# EAGLE board wigl_sch_motors (EAGLE 7.2.0)
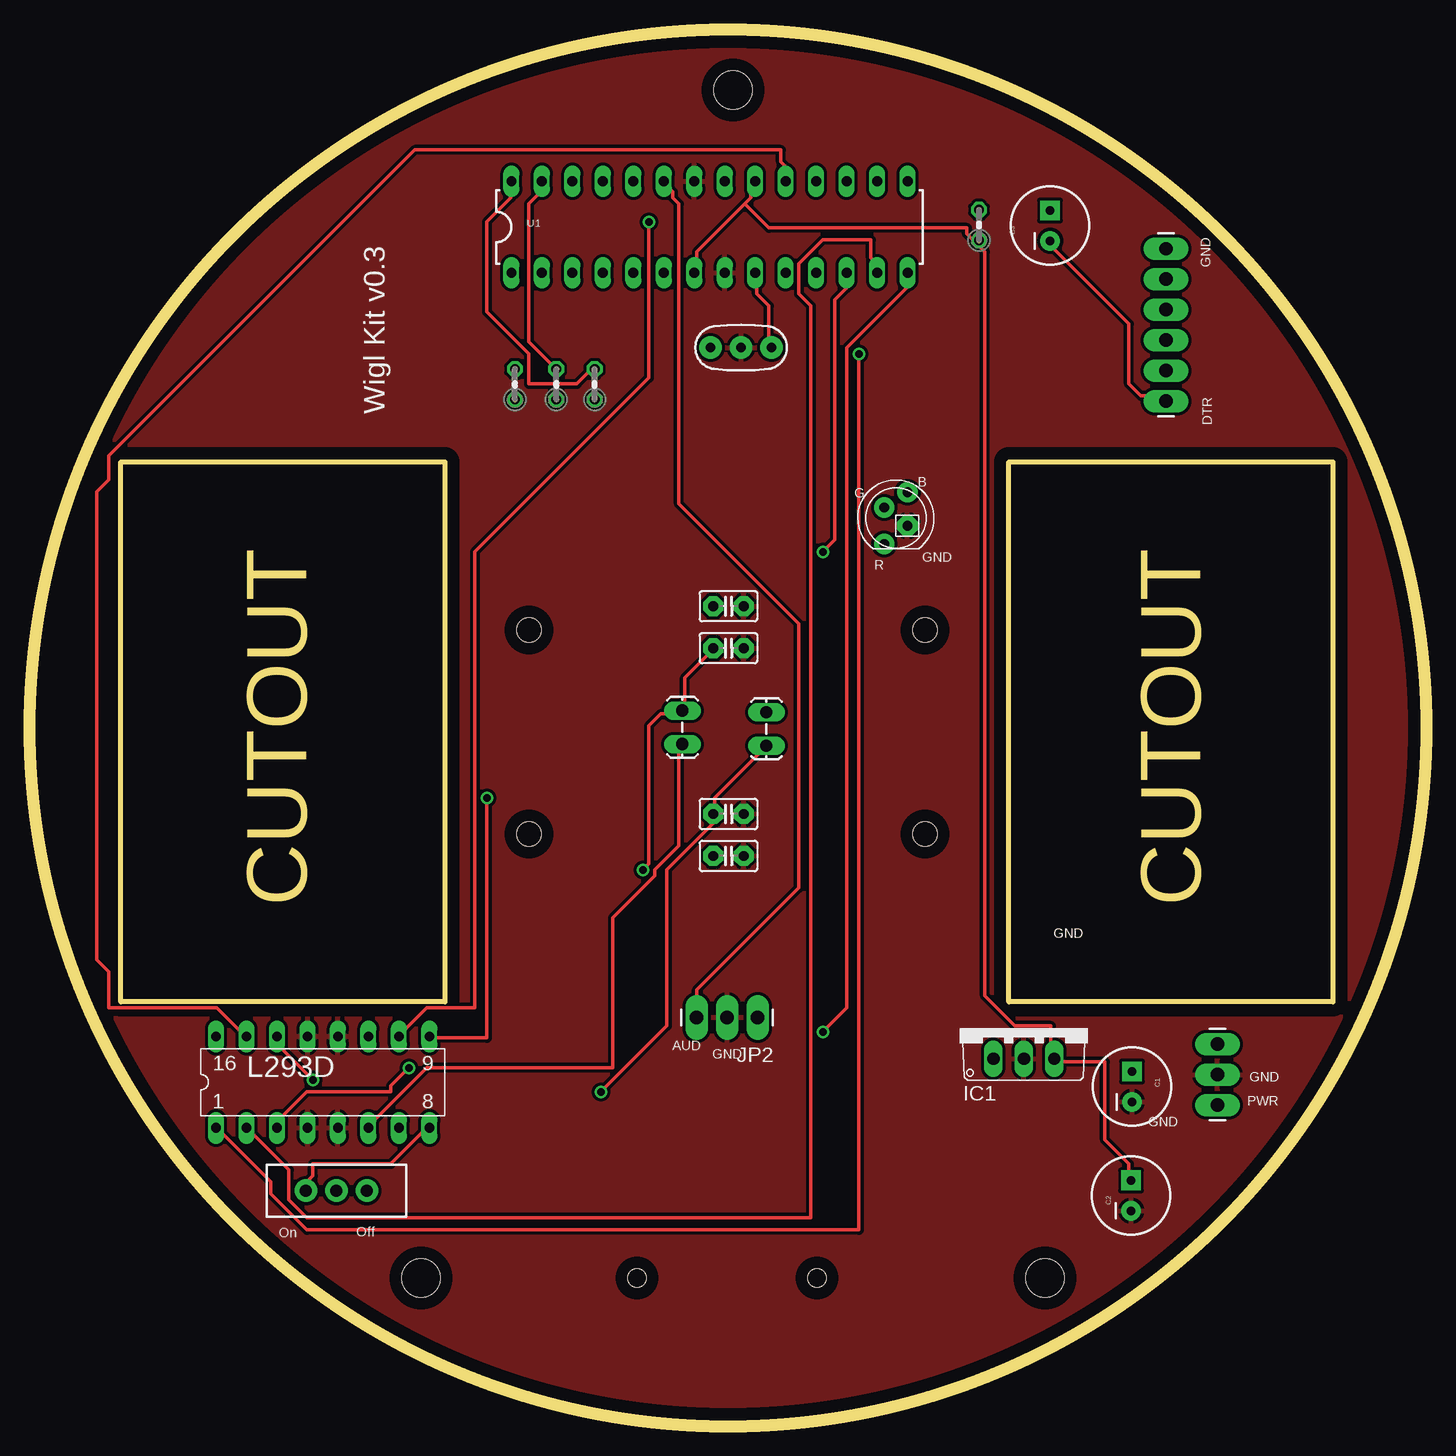
[diagram p0: board, top side]
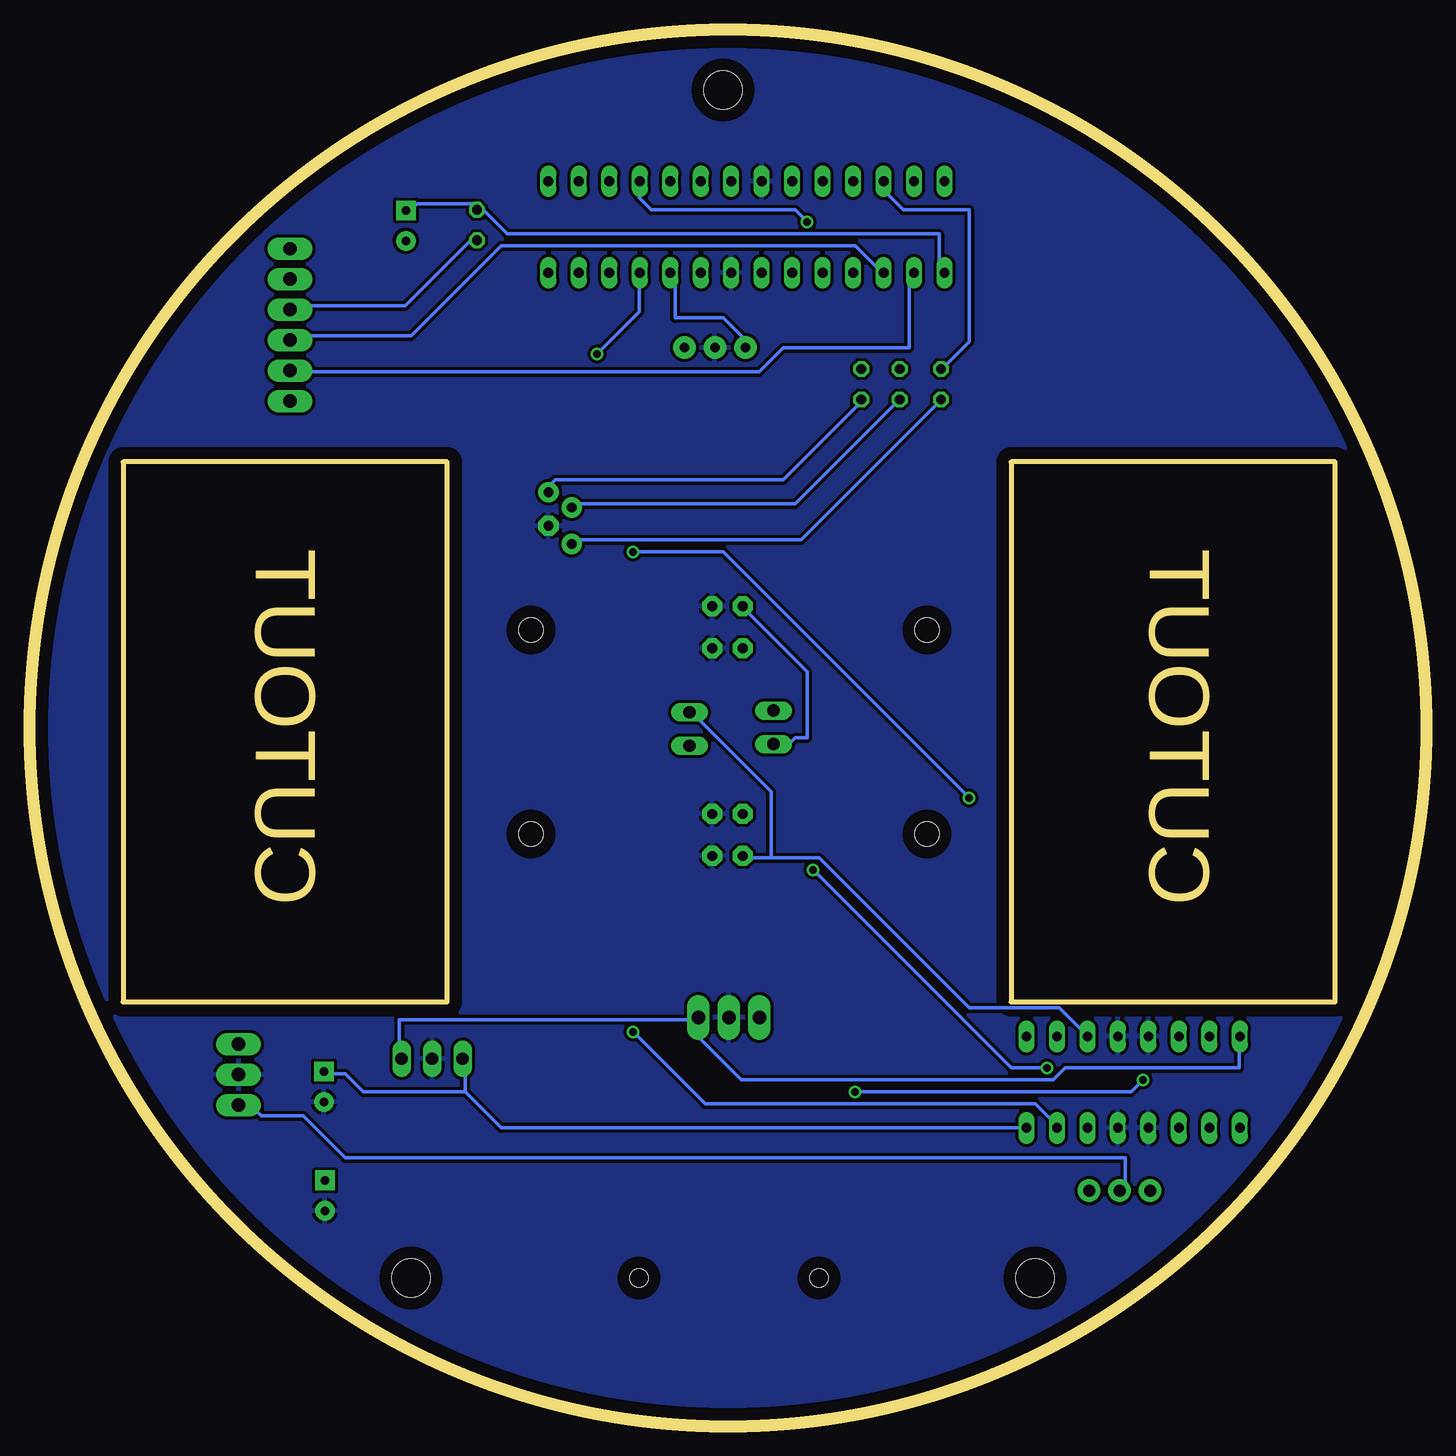
[diagram p1: board, bottom side, seen from below]

Size 116.33 x 116.33 mm. Coordinates in mm from the lower left corner, seen from the top.
Outline: circle at 58.17,58.17 radius 58.17
Copper layers (1*16): Top 0.035mm / dielectric 1.5mm / Bottom 0.035mm
Design rules "default": minimum track width 10mil, minimum drill 24mil, track to track 8mil, track to pad 8mil, pad to pad 8mil, via to via 8mil, smd to smd 8mil, copper to edge 40mil, drill to drill 8mil, minimum pad ring 10mil, minimum via ring 8mil, stop-mask expansion 4mil, vias tented up to drill 0mil, thermal gap 10mil
Net classes: 0 default: width 0.305 mm, drill 0.508 mm, clearance 0.254 mm
Holes 2 mm at 41.58,66.34 41.58,49.34 74.58,66.34 74.58,49.34
Holes 1.5 mm at 50.58,12.34 65.58,12.34
Holes 3.2 mm at 58.58,111.34 32.58,12.34 84.58,12.34
tRestrict: 8 lines
bRestrict: 8 lines

## Footprints (pad centres in the part's own frame; a part is rotated, then mirrored left to right if it is on the bottom)
CPOL-RADIAL-100UF-25V = drill 0.7 pad 1.651 square: 1 1.27,0 | drill 0.7 pad 1.651: 2 -1.27,0
C025-025X050 = drill 0.813 pad 1.676 octagon: 1 -1.27,0; 2 1.27,0
TO220V = drill 1.016 long: 1 -2.54,-2.54; 2 0,-2.54; 3 2.54,-2.54
1X03_LONGPADS = drill 1.118 pad 1.88 long: 1 0,0; 2 2.54,0; 3 5.08,0
1X02_LOCK_LONGPADS = drill 1.016 long: 1 -0.127,0; 2 2.667,0
1X06_LONGPADS = drill 1.118 pad 1.88 long: 1 0,0; 2 2.54,0; 3 5.08,0; 4 7.62,0; 5 10.16,0; 6 12.7,0
DIP16 = drill 0.813 long: 1 -8.89,-3.81; 2 -6.35,-3.81; 3 -3.81,-3.81; 4 -1.27,-3.81; 5 1.27,-3.81; 6 3.81,-3.81; 7 6.35,-3.81; 8 8.89,-3.81; 9 8.89,3.81; 10 6.35,3.81; 11 3.81,3.81; 12 1.27,3.81; 13 -1.27,3.81; 14 -3.81,3.81; 15 -6.35,3.81; 16 -8.89,3.81
0204V = drill 0.813 octagon: 1 -1.27,0; 2 1.27,0
LED5MMRGB = drill 0.8 pad 1.676: 1 -2.159,0.968; 3 0.889,0.968; 4 2.159,-0.968 | drill 0.8 pad 1.676 octagon: 2 -0.635,-0.968
SWITCH-SPDT = drill 1.016 pad 1.88: 1 0,2.54; 2 0,0; 3 0,-2.54
DIL28-3 = drill 0.813 long: 1 -16.51,-3.81; 2 -13.97,-3.81; 3 -11.43,-3.81; 4 -8.89,-3.81; 5 -6.35,-3.81; 6 -3.81,-3.81; 7 -1.27,-3.81; 8 1.27,-3.81; 9 3.81,-3.81; 10 6.35,-3.81; 11 8.89,-3.81; 12 11.43,-3.81; 13 13.97,-3.81; 14 16.51,-3.81; 15 16.51,3.81; 16 13.97,3.81; 17 11.43,3.81; 18 8.89,3.81; 19 6.35,3.81; 20 3.81,3.81; 21 1.27,3.81; 22 -1.27,3.81; 23 -3.81,3.81; 24 -6.35,3.81; 25 -8.89,3.81; 26 -11.43,3.81; 27 -13.97,3.81; 28 -16.51,3.81
RESONATOR-PTH = drill 0.8 pad 1.88: 1 -2.54,0; 2 0,0; 3 2.54,0

## Placement (x,y rotation side)
C1  100uF  [CPOL-RADIAL-100UF-25V]  91.84,28.28 90 top
C2  10uF  [CPOL-RADIAL-100UF-25V]  91.76,19.2 90 top
C3  10uF  [CPOL-RADIAL-100UF-25V]  85.01,100.03 90 top
C4  1uf  [C025-025X050]  58.21,64.82 0 top
C5  1uf  [C025-025X050]  58.21,68.32 0 top
C6  1uf  [C025-025X050]  58.21,47.51 0 top
C7  1uf  [C025-025X050]  58.21,51.01 0 top
IC1  7805TV  [TO220V]  82.83,33.15 0 top
JP1  [1X03_LONGPADS]  98.96,31.83 270 top
JP2  [1X03_LONGPADS]  60.63,34.05 180 top
JP3  [1X02_LOCK_LONGPADS]  54.37,59.5 270 top
JP4  [1X02_LOCK_LONGPADS]  61.37,59.36 270 top
JP5  [1X06_LONGPADS]  94.67,98.11 270 top
L293D  [DIP16]  24.4,28.66 0 top
R1  10k  [0204V]  79.09,100.08 90 top
R2  [0204V]  40.42,86.81 90 top
R3  [0204V]  43.86,86.81 90 top
R4  [0204V]  47.06,86.81 90 top
RGB  RGBLED_CA-5MM  [LED5MMRGB]  72.16,75.66 90 top
SW  [SWITCH-SPDT]  25.53,19.61 270 top
U1  ATMEGA328P_PDIP  [DIL28-3]  56.63,99.92 0 top
Y1  [RESONATOR-PTH]  59.26,89.87 180 top

## Library data of the parts
C1 C2 = SparkFun-Capacitors
C3 = SparkFun-Passives
C4-C7 R1-R4 RGB = adafruit
IC1 = linear
JP1-JP5 = SparkFun-Connectors
L293D = ads
SW = SparkFun-Electromechanical
U1 = SparkFun-DigitalIC
Y1 = SparkFun-FreqCtrl

## Nets
5V: C2.1 IC1.3 JP2.1 JP5.3 L293D.16 R1.1 U1.7 U1.20
AUD: JP2.3 U1.23
BLED: R4.2 U1.28
GLED: R3.2 U1.27
GND: C1.2 C2.2 C4.2 C5.2 C6.2 C7.2 IC1.2 JP1.2 JP2.2 L293D.4 L293D.5 L293D.12 L293D.13 RGB.2 U1.8 U1.22 Y1.2
N$1: JP1.3 SW.2
N$2: R4.1 RGB.4
N$3: R3.1 RGB.3
N$4: C3.2 JP5.6
N$5: U1.9 Y1.1
N$6: U1.10 Y1.3
N$7: L293D.9 U1.12
N$8: R2.1 RGB.1
N$9: L293D.2 U1.13
N$10: L293D.7 U1.14
N$11: U1.15
N$12: U1.16
N$13: U1.17
N$14: L293D.10 U1.18
N$15: L293D.15 U1.19
N$16: L293D.1 U1.11
OUT1A: C4.1 JP3.1 L293D.3
OUT1B: C5.1 JP3.2 L293D.6
OUT2A: C6.1 JP4.1 L293D.11
OUT2B: C7.1 JP4.2 L293D.14
RLED: R2.2 U1.26
RST: C3.1 R1.2 U1.1
RX: JP5.5 U1.2
TX: JP5.4 U1.3
V_BATT: C1.1 IC1.1 L293D.8 SW.3

## Tracks (layer width: path | path; a pad name or v marks a point on that pad's centre or on a via)
5V
  Top 0.305: 59.58,101.84 60.08,102.34 60.08,103.34 U1.20 | 59.58,101.84 55.58,97.84 55.58,96.34 U1.7 | 59.58,101.84 61.58,99.84 78.08,99.84 78.08,99.34 79.08,98.34 | C2.1 91.58,20.84 91.58,21.84 89.58,23.84 89.58,30.34 85.58,30.34 IC1.3 85.08,30.84 85.08,33.34 82.08,33.34 79.58,35.84 79.58,97.84 79.08,98.34 | 79.08,98.34 R1.1
  Bottom 0.305: R1.1 79.58,98.84 85.08,93.34 94.58,93.34 JP5.3 | L293D.16 15.58,32.34 15.58,29.84 30.08,29.84 31.08,28.84 57.08,28.84 60.58,32.34 60.58,33.84 JP2.1 61.08,33.84 85.58,33.84 85.58,30.84 IC1.3
AUD
  Top 0.305: U1.23 53.08,103.34 53.58,102.84 53.58,102.34 54.08,101.84 54.08,76.84 64.08,66.84 64.08,44.84 55.58,36.34 55.58,34.34 JP2.3
BLED
  Top 0.305: R4.2 46.58,87.84 45.58,86.84 41.58,86.84 41.58,89.34 38.08,92.84 38.08,100.34 40.08,102.34 40.08,103.34 U1.28
GLED
  Top 0.305: R3.2 43.58,88.34 41.58,90.34 41.58,101.84 42.58,102.84 42.58,103.34 U1.27
GND
  pour Top: -3.42,118.34 121.58,118.34 121.58,-5.66 -6.42,-5.66 -6.42,118.34
  pour Bottom: -3.42,118.34 119.58,118.34 119.58,-3.66 -3.42,-3.66
N$1
  Bottom 0.305: SW.2 25.08,19.84 25.08,22.34 90.08,22.34 93.58,25.84 97.08,25.84 97.58,26.34 98.58,26.34 JP1.3
N$2
  Bottom 0.305: R4.1 47.08,85.34 53.58,78.84 72.58,78.84 73.58,77.84 RGB.4
N$3
  Bottom 0.305: R3.1 44.08,85.34 52.58,76.84 71.08,76.84 RGB.3
N$4
  Top 0.305: C3.2 85.08,98.34 91.58,91.84 91.58,86.84 92.58,85.84 94.58,85.84 JP5.6
N$5
  Top 0.305: U1.9 60.58,95.84 60.58,94.34 61.58,93.34 61.58,90.34 Y1.1
N$6
  Bottom 0.305: U1.10 62.58,95.84 62.58,92.34 58.58,92.34 56.58,90.34 Y1.3
N$7  (via drill 0.61)
  Top 0.305: v38.08,52.34 38.08,32.34 33.58,32.34 L293D.9 | v66.08,72.84 67.08,73.84 67.08,93.84 68.08,94.84 68.08,95.84 U1.12
  Bottom 0.305: v38.08,52.34 58.58,72.84 v66.08,72.84
N$8
  Bottom 0.305: R2.1 40.58,85.34 52.08,73.84 71.08,73.84 RGB.1
N$9
  Top 0.305: L293D.2 18.08,24.84 21.58,21.34 21.58,18.84 23.08,17.34 65.08,17.34 65.08,93.34 64.08,94.34 64.08,96.84 66.08,98.84 70.08,98.84 70.08,97.34 70.58,96.84 70.58,96.34 U1.13
N$10  (via drill 0.61)
  Top 0.305: v66.08,32.84 68.08,34.84 68.08,89.84 73.08,94.84 73.08,95.84 U1.14
  Bottom 0.305: v66.08,32.84 60.08,26.84 32.58,26.84 31.08,25.34 L293D.7
N$14  (via drill 0.61)
  Top 0.305: v51.58,100.34 51.58,87.34 37.08,72.84 37.08,34.84 33.08,34.84 31.08,32.84 L293D.10
  Bottom 0.305: v51.58,100.34 52.58,101.34 64.58,101.34 65.58,102.34 65.58,103.34 U1.18
N$15
  Top 0.305: L293D.15 17.58,32.84 15.58,34.84 6.58,34.84 6.58,37.84 5.58,38.84 5.58,77.84 6.58,78.84 6.58,80.84 32.08,106.34 62.58,106.34 62.58,105.34 63.08,104.84 63.08,103.84 U1.19
N$16  (via drill 0.61)
  Top 0.305: v69.08,89.34 69.08,16.34 23.08,16.34 20.08,19.34 20.08,20.34 15.58,24.84 L293D.1
  Bottom 0.305: v69.08,89.34 65.58,92.84 65.58,95.84 U1.11
OUT1A  (via drill 0.61)
  Top 0.305: v31.58,29.84 30.08,28.34 30.08,27.84 23.08,27.84 21.08,25.84 21.08,25.34 L293D.3 | v51.08,46.34 51.58,46.84 51.58,58.34 52.58,59.34 54.08,59.34 JP3.1 54.58,59.84 54.58,62.34 56.58,64.34 C4.1
  Bottom 0.305: v31.58,29.84 34.58,29.84 v51.08,46.34
OUT1B
  Top 0.305: L293D.6 28.58,25.34 33.08,29.84 48.58,29.84 48.58,42.34 52.08,45.84 52.08,46.34 54.08,48.34 54.08,56.34 JP3.2
  Bottom 0.305: C5.1 56.58,67.84 51.58,62.84 51.58,57.34 52.58,57.34 53.08,56.84 54.08,56.84 JP3.2
OUT2A
  Bottom 0.305: L293D.11 30.58,34.84 38.08,34.84 50.58,47.34 54.58,47.34 | 54.58,47.34 56.58,47.34 C6.1 | 54.58,47.34 54.58,52.84 61.08,59.34 JP4.1
OUT2B  (via drill 0.61)
  Top 0.305: v23.58,28.84 21.08,31.34 21.08,32.34 L293D.14 | v47.58,27.84 53.08,33.34 53.08,46.34 57.08,50.34 57.08,50.84 C7.1 57.08,51.34 57.08,52.34 61.08,56.34 JP4.2
  Bottom 0.305: v23.58,28.84 24.58,27.84 v47.58,27.84
RLED
  Bottom 0.305: R2.2 40.08,88.34 38.08,90.34 38.08,101.34 43.58,101.34 45.58,103.34 U1.26
RST
  Bottom 0.305: U1.1 40.58,96.34 40.58,99.34 76.58,99.34 78.58,101.34 R1.2 79.08,101.84 84.08,101.84 84.58,101.34 C3.1
RX
  Bottom 0.305: U1.2 43.08,95.84 43.08,89.84 53.58,89.84 55.58,87.84 94.58,87.84 JP5.5
TX
  Bottom 0.305: U1.3 45.58,96.34 47.58,98.34 77.08,98.34 84.58,90.84 94.58,90.84 JP5.4
V_BATT
  Top 0.305: L293D.8 33.08,24.84 30.08,21.84 23.58,21.84 23.58,20.84 23.08,20.34 23.08,19.84 SW.3
  Bottom 0.305: 80.08,27.84 80.08,30.34 IC1.1 | 80.08,27.84 88.58,27.84 90.08,29.34 91.58,29.34 C1.1 | 80.08,27.84 77.08,24.84 33.58,24.84 L293D.8

## Text on the board
Dimension: CUTOUT | CUTOUT
tPlace: GND | B | G | GND | R | GND | GND | GND
tNames: DTR | Wigl Kit v0.3 | AUD | GND | PWR | On | Off